# Altium PCB PcbCollier2016.PCBDOC
Units mil, origin at the board's own origin, x right, y up, seen from the top; angles counter-clockwise.
Board outline 11800 x 7870 mil, 2 copper layers (Top Layer, Bottom Layer); 32 components, 37 nets, 134 pads, 0 vias.
Unrouted connection lines stored in the file: 79.
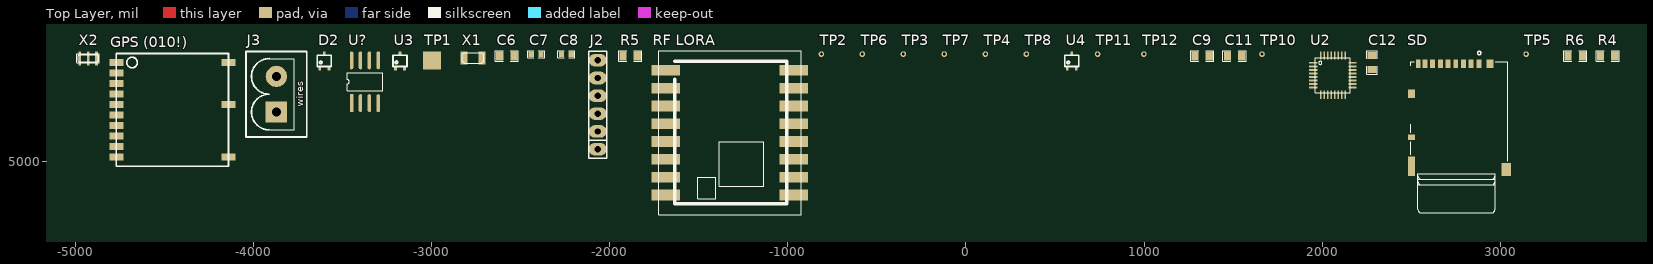
[diagram p0: Top Layer view]
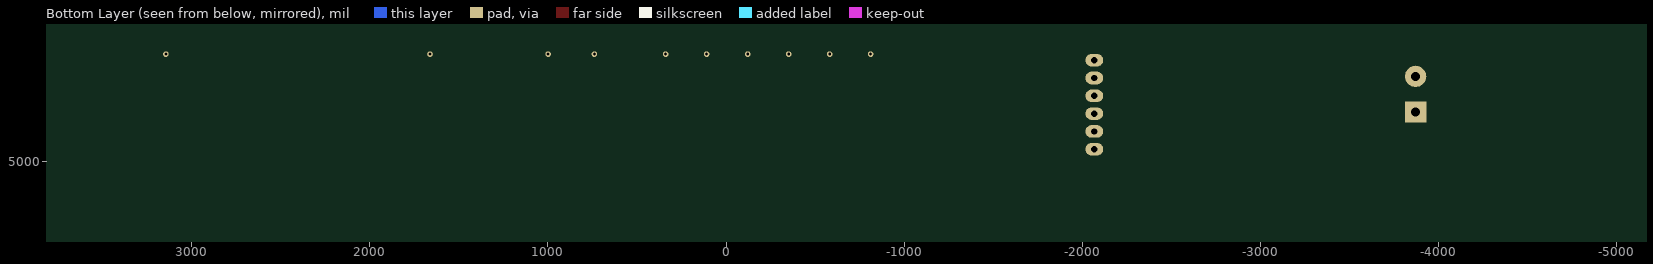
[diagram p1: Bottom Layer view, seen from below]

## Layer stack, top to bottom
Top Solder: solder mask 0.4, Solder Resist, Dk 3.5
Top Layer: signal copper 1.4
Dielectric1: dielectric 12.6, FR-4, Dk 4.8
Bottom Layer: signal copper 1.4
Bottom Solder: solder mask 0.4, Solder Resist, Dk 3.5

## Board outline
-5576.97,-1826.38 6223.03,-1826.38 6223.03,6043.62 -5576.97,6043.62

## Design rules (kind name [scope] priority, off if disabled: settings)
Clearance Clearance_bottom_polygon [OnLayer('Bottom Layer') Or OnLayer('Multi-Layer') vs OnLayer('Bottom Layer')  And  InPoly] p1: gap=20
Clearance Clearance_top_polygon [OnLayer('Top Layer')  Or OnLayer('Multi-Layer') vs OnLayer('Top Layer') And InPoly] p2: gap=20
Clearance Clearance_bottom [OnLayer('Bottom Layer') Or OnLayer('Multi-Layer') vs OnLayer('Bottom Layer')  And Not InPoly] p3: gap=8
Clearance Clearance_top [OnLayer('Top Layer')  Or OnLayer('Multi-Layer') vs OnLayer('Top Layer') And Not InPoly] p4: gap=8
Clearance Clearance_pad_to_pad [OnLayer('Multi-Layer') vs OnLayer('Multi-Layer')] p5: gap=10
ComponentClearance ComponentClearance_bottom [OnLayer('Bottom Overlay') vs OnLayer('Bottom Overlay')] p1: gap=0 collisioncheckmode=3 verticalgap=10 showdistances=FALSE
ComponentClearance ComponentClearance_top [OnLayer('Top Overlay') vs OnLayer('Top Overlay')] p2: gap=0 collisioncheckmode=3 verticalgap=10 showdistances=FALSE
FabricationTestPointUsage TestPointUsage [All] p1: valid=0 allowmultiple=FALSE
FabricationTestpoint Testpoint [All] p1: side=3 testpointundercomponent=TRUE minsize=40 maxsize=100 preferedsize=60 minholesize=0 maxholesize=40 preferedholesize=32 testpointgrid=1 allowsidetop=TRUE allowsidebottom=TRUE usegrid=TRUE gridtolerance=0.01
HoleSize [All] p1: absolutevalues=TRUE maxlimit=1000 minlimit=16 maxpercent=80.000 minpercent=20.000
MinimumAnnularRing [PadXSize_AllLayers = PadYSize_AllLayers] p1: minimumring=10
PermittedLayers [All] p1: toplayerpermitted=TRUE bottomlayerpermitted=TRUE
PolygonConnect [All] p1: connectstyle=Relief reliefconductorwidth=24 reliefentries=4 polygonreliefangle="90 Angle" airgapwidth=10
RoomDefinition SchemaCollier2016 [InComponentClass('SchemaCollier2016')] p1: confinementstyle=ConfineIn formatcopy=TRUE lockcomponents=FALSE outline -4998,4696 3674,4696 3674,5728 -4998,5728
RoutingVias [All] p1: holewidth=16 width=32 viastyle="Through Hole" minholewidth=15.75 minwidth=31.5 maxholewidth=23.62 maxwidth=393.7
SMDToPlane [All] p1: distance=0
SolderMaskExpansion [All] p1: expansion=4
ViasUnderSMD [All] p1: allowed=FALSE
Width Width_botom_top [OnLayer('Bottom Layer') or OnLayer('Top Layer')] p1: maxlimit=10000 minlimit=10 preferedwidth=32 minimp=50.000000 maximp=50.000000 favimp=50.000000
26 further rules are at their usual default settings.

## Components (designator, comment, footprint, x,y, rotation, side; value= is the part's Value field where it differs from the comment)
C6 "CAP" 0805 -2618,5592 r0 top
C7 "CAP" 0603 -2441,5602 r0 top
C8 "CAP" 0603 -2271,5602 r0 top
C9 "CAP" 0805 1286,5592 r0 top
C11 "CAP" 0805 1468,5592 r0 top
C12 "CAP" 0805 2279,5516 r90 top
D2 "STPS0520" PCBComponent_1 -3603,5607 r0 top
"GPS (010!)" "FGPMMOPA6H" FGPMMOPA6H -4771,5556 r0 top
J2 "6 pins de programmation" arduino6 -2068,5069 r90 top
J3 "Deux sorties pour fils pile 3,6" AMP_2 -3872,5278 r90 top
R4 "RES" 0805 3563,5592 r0 top
R5 "RES" 0805 -1926,5592 r0 top
R6 "RES" 0805 3381,5592 r0 top
"RF LORA" "RF-LORA-868-SO" RF-LORA-868-SO -1686,5512 r0 top
SD "DM3AT-SF-PEJM5" HRS_DM3AT-SF-PEJM5_DM3AT-SF-PEJM5(Primary) 2754,5550 r0 top
TP1 "TESTPOINT" testpoint3 -2999,5568 r0 top
TP2 "TESTPOINT" mini_testpoint -812,5603 r90 top
TP3 "TESTPOINT" mini_testpoint -352,5603 r90 top
TP4 "TESTPOINT" mini_testpoint 109,5603 r90 top
TP5 "TESTPOINT" mini_testpoint 3145,5603 r90 top
TP6 "TESTPOINT" mini_testpoint -582,5603 r90 top
TP7 "TESTPOINT" mini_testpoint -122,5603 r90 top
TP8 "TESTPOINT" mini_testpoint 339,5603 r90 top
TP10 "TESTPOINT" mini_testpoint 1662,5603 r90 top
TP11 "TESTPOINT" mini_testpoint 739,5603 r90 top
TP12 "TESTPOINT" mini_testpoint 999,5603 r90 top
U2 "ATMEGA328P-AU/MU" LQFP32 1950,5554 r0 top
U3 "MCH3333A" PCBComponent_1 -3178,5607 r0 top
U4 "MCH3333A" PCBComponent_1 594,5607 r0 top
U? "MCP7940" SO8 -3450,5328 r90 top
X1 "10.000MHz" QTC3 -2818,5582 r0 top
X2 "CSTCExxx" CSTCE_RES -4976,5579 r0 top

## Footprints (in the part's own frame and the unit in brackets; to place one, negate y for a bottom-side part, rotate by r counter-clockwise, add the part's x,y. Pads: shape width x height; smd on the part's side, far side on the other; paste and mask are expansions set on the pad)
0603 [mil]
  rect 30x30 smd: 1(0,0) 2(55,0)
  silkscreen extent -20,-20 75,20
0805 [mil]
  rect 40x50 smd: 1(0,0) 2(80,0)
  silkscreen extent -25,-30 105,30
AMP_2 [mil]
  rect 120x120 hole 52: 1(0,0)
  round 120 hole 52: 2(200,0)
  silkscreen extent -140,-170 340,170
arduino6 [mm]
  oval 1.8x2.54 hole 0.9: 1(0,0) 2(2.54,0) 3(5.08,0) 4(7.62,0) 5(10.16,0) 6(12.7,0)
  silkscreen extent -1.27,-1.27 13.97,1.27
CSTCE_RES [mm]
  rect 0.4x2 smd: 1(0,0) 2(1.2,0) 3(2.4,0)
  silkscreen extent -0.4,-0.65 2.8,0.65
FGPMMOPA6H [mm]
  rect 2x1 smd: 1(0,0) 2(0,-1.5) 3(0,-3) 4(0,-4.5) 5(0,-6) 6(0,-7.5) 7(0,-9) 8(0,-10.5) 9(0,-12) 10(0,-13.5) 11(16,-13.5) 12(16,-6) 13(16,0)
  silkscreen extent 0,-14.8 16,1.3
HRS_DM3AT-SF-PEJM5_DM3AT-SF-PEJM5(Primary) [mm]
  rect 0.7x1.2 smd paste-25.4 mask-25.4: 1(3.2,0) 2(2.1,0) 3(1,0) 4(-0.1,0) 5(-1.2,0) 6(-2.3,0) 7(-3.4,0) 8(-4.5,0) SWB(-5.45,0)
  rect 1x1.2 smd paste-25.4 mask-25.4: P1(-6.4,-4.3) P4(4.75,0)
  rect 1x2.8 smd paste-25.4 mask-25.4: P2(-6.4,-14.65)
  rect 1.3x1.9 smd paste-25.4 mask-25.4: P3(7.1,-15.1)
  rect 1x0.8 smd paste-25.4 mask-25.4: SWA(-6.4,-10.5)
  silkscreen extent -6.5,-21.3 7.35,1.75
LQFP32 [mm]
  oval 1.2x0.25 smd: 1(0,0)
  rect 1.2x0.25 smd: 2(0,-0.5) 3(0,-1) 4(0,-1.5) 5(0,-2) 6(0,-2.5) 7(0,-3) 8(0,-3.5) 17(5.6,-3.5) 18(5.6,-3) 19(5.6,-2.5) 20(5.6,-2) 21(5.6,-1.5) 22(5.6,-1) 23(5.6,-0.5) 24(5.6,0)
  rect 0.25x1.2 smd: 9(1.05,-4.55) 10(1.55,-4.55) 11(2.05,-4.55) 12(2.55,-4.55) 13(3.05,-4.55) 14(3.55,-4.55) 15(4.05,-4.55) 16(4.55,-4.55) 25(4.55,1.05) 26(4.05,1.05) 27(3.55,1.05) 28(3.05,1.05) 29(2.55,1.05) 30(2.05,1.05) 31(1.55,1.05) 32(1.05,1.05)
  silkscreen extent 0.28,-4.27 5.29,0.74
mini_testpoint [mm]
  round 0.8 hole 0.4: 1(0,0)
PCBComponent_1 [mm]
  rect 0.4x0.6 smd: 1(-0.65,-2.1) 2(0.65,-2.1) 3(0,0)
  silkscreen extent -1,-1.85 1,-0.25
QTC3 [mil]
  rect 40x72 smd: 1(0,0) 2(100,0)
  silkscreen extent -10,-30 110,30
RF-LORA-868-SO [mil]
  rect 160x60 smd: 1(0,0) 2(0,-100) 3(0,-200) 4(0,-300) 5(0,-400) 6(0,-500) 7(0,-600) 8(0,-700) 9(720,-700) 10(720,-600) 11(720,-500) 12(720,-400) 13(720,-300) 14(720,-200) 15(720,-100) 16(720,0)
  silkscreen extent -40,-810 760,110
SO8 [mil]
  rect 100x20 smd: 1(0,0)
  oval 100x20 smd: 2(0,-50) 3(0,-100) 4(0,-150) 5(240,-150) 6(240,-100) 7(240,-50) 8(240,0)
  silkscreen extent 69,-175 171,25
testpoint3 [mil]
  rect 100x100 smd: 1(0,0)

## Part data
C6 C7 C8 C9 C11 C12: "capacité non polarisée"
J2: library part arduinorev3_analog_in
J3: library part POWER2, "connecteur alim 2 pôles"
R4 R5 R6: "resistance"
SD: "DM3 Series 8 Position Right Angle SMT Push Push Ejection MicroSD Card Connector"
X1: library part XTAL, "Quartz"
X2: library part CSTCE_XXXX, "Murata CSTCE resonators series"

## Nets (pads, with @x,y where several pads share a name; then routed paths per layer and width w, separated by ;. In a path a pad name is that pad's centre, name@x,y a point inside that pad or via, vN(x,y) a via of type N, cw(c..) or ccw(c..) an arc to the next point about the centre after c; other vN are vias at no path point)
_CS_LORA: "RF LORA.16" U2.26
CS_SD: SD.2 U2.14
GATE1: R5.2 U2.9 U3.1
GATE2: R6.1 U2.10 U4.1
GND: "GPS (010!).3" "GPS (010!).8" "GPS (010!).11" "GPS (010!).12" "GPS (010!).13" "RF LORA.2" C6.1 C7.1 C8.1 C9.1 C11.1 C12.1 J2.1 J3.2 SD.6 U2.3 U2.5 U2.21 U?.8 X2.2
LORARESET: "RF LORA.12" J2.2 R4.1 U2.29
MFP_RTC: U2.32 U?.3
MISO_LORA: "RF LORA.15" J2.6 U2.24
MISO_SD: SD.7 U2.16
MOSI_LORA: "RF LORA.14" J2.3 U2.25
MOSI_SD: SD.3 U2.15
NetC7_2: C7.2 U?.6 X1.1
NetC8_2: C8.2 U?.5 X1.2
NetD2_1: D2.1 J3.1
"NetGPS (010!)_1": "GPS (010!).1" U3.3
"NetGPS (010!)_2": "GPS (010!).2" TP1.1
"NetRF LORA_1": "RF LORA.1" TP5.1
"NetRF LORA_3": "RF LORA.3" U4.3
"NetRF LORA_6": "RF LORA.6" TP4.1
"NetRF LORA_7": "RF LORA.7" TP3.1
"NetRF LORA_8": "RF LORA.8" TP2.1
"NetRF LORA_9": "RF LORA.9" TP6.1
"NetRF LORA_10": "RF LORA.10" TP7.1
"NetRF LORA_11": "RF LORA.11" TP8.1
NetTP10_1: TP10.1 U2.22
NetTP11_1: TP11.1 U2.19
NetTP12_1: TP12.1 U2.20
OSC1: U2.7 X2.1
OSC2: U2.8 X2.3
RX_GPS: "GPS (010!).10" U2.31
RXLORA: "RF LORA.4" U2.12
SCL_RTC: U2.28 U?.2
SCLK: "RF LORA.13" J2.4 SD.5 U2.17
SDA_RTC: U2.27 U?.1
TX_GPS: "GPS (010!).9" U2.30
TXLORA: "RF LORA.5" U2.13
"VCC 3.3": "GPS (010!).4" C6.2 C9.2 C11.2 C12.2 D2.2 J2.5 R4.2 R6.2 SD.4 U2.4 U2.6 U2.18 U3.2 U4.2 U?.4
pads on no net: "GPS (010!).5" "GPS (010!).6" "GPS (010!).7" D2.3 R5.1 SD.1 SD.8 SD.P1 SD.P2 SD.P3 SD.P4 SD.SWA SD.SWB U2.1 U2.2 U2.11 U2.23 U?.7

## Keep-outs
Keep-Out Layer:
  rectangle: -5539.17,-1682.28 -5342.32,6191.73
  rectangle: -5342.32,-1682.28 6075,-1485.43
  rectangle: 5878.15,-1485.43 6075,6191.73
  rectangle: -5342.32,5994.88 5878.15,6191.73

## Silkscreen, mask and mechanical layers (free items; w line width, h text height)
Top Overlay:
  text "Les bandes en violet delimitent la surface utilisable...." at -5705,7080 h250
  text "Mais vous n'etes pas obliges de tout utiliser!!" at -5065,6675 h250

## Text inside footprints (layer, text, board x,y; h text height)
J3: Top Overlay "wires" at -3722,5308 h39.37 r90